# Altium PCB 1x9x1.PcbDoc
Units mm, origin at the board's own origin, x right, y up, seen from the top; angles counter-clockwise.
Board outline 46 x 127 mm, 4 copper layers (Top Layer, Mid-Layer 1, Mid-Layer 2, Bottom Layer), stack 1.105 mm thick; 38 components, 27 nets, 330 pads, 0 vias.
Unrouted connection lines stored in the file: 143.
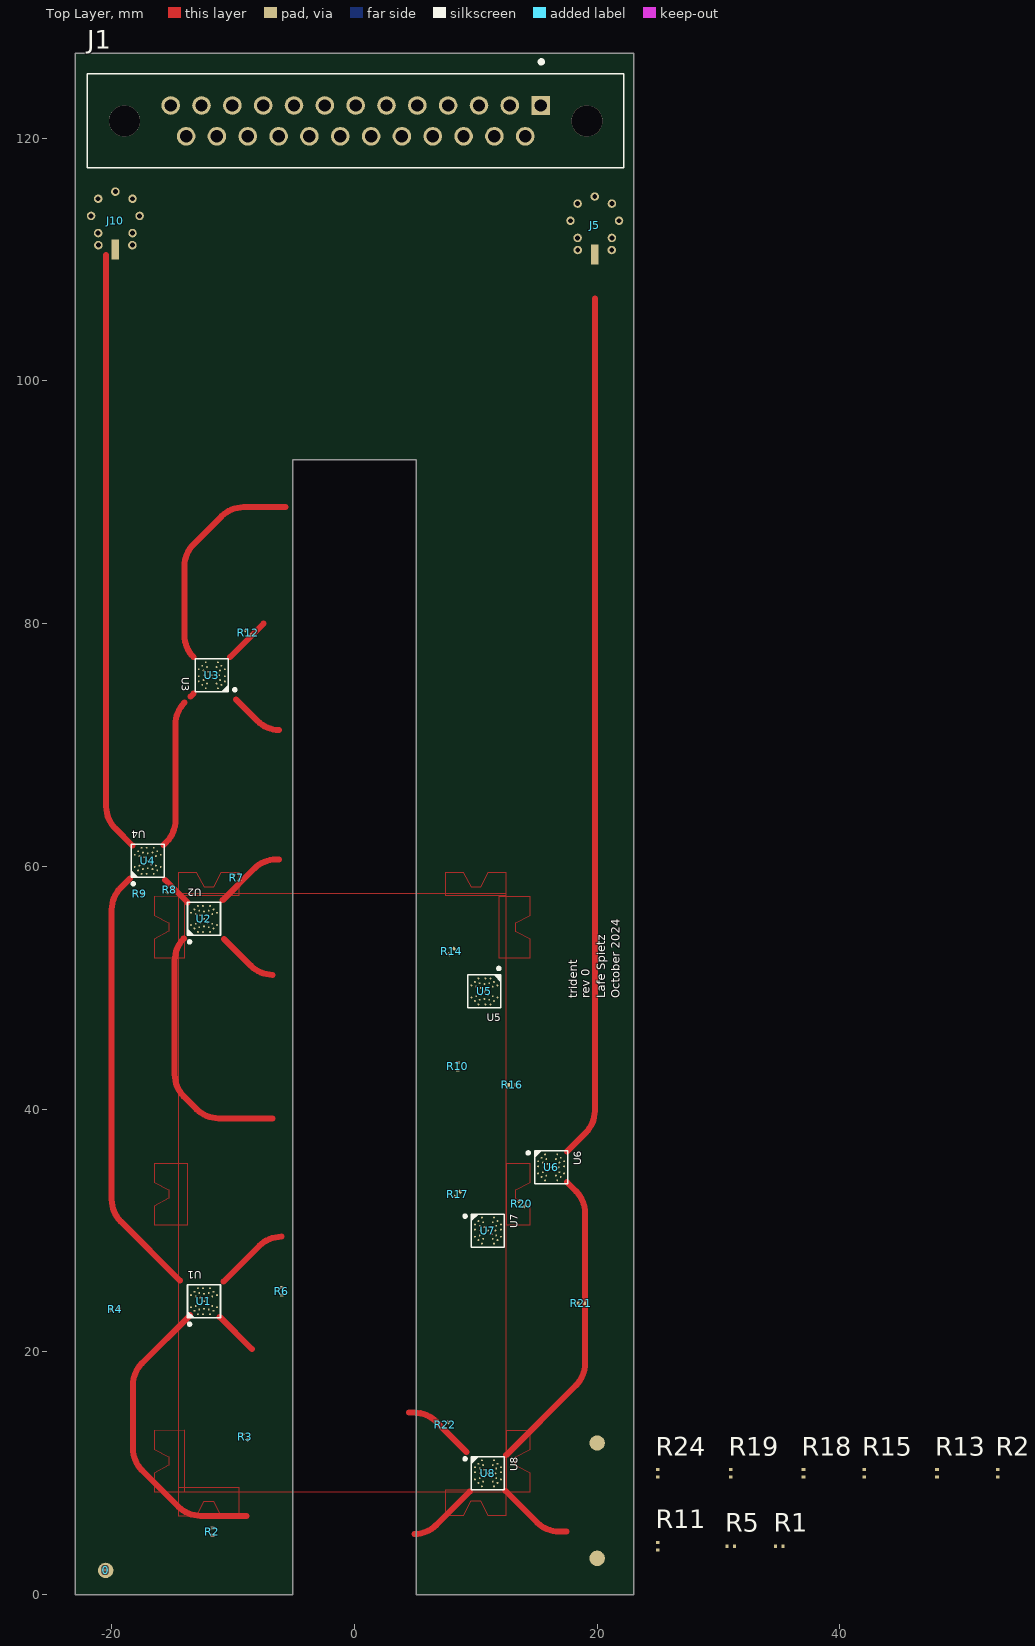
[diagram p0: Top Layer view]
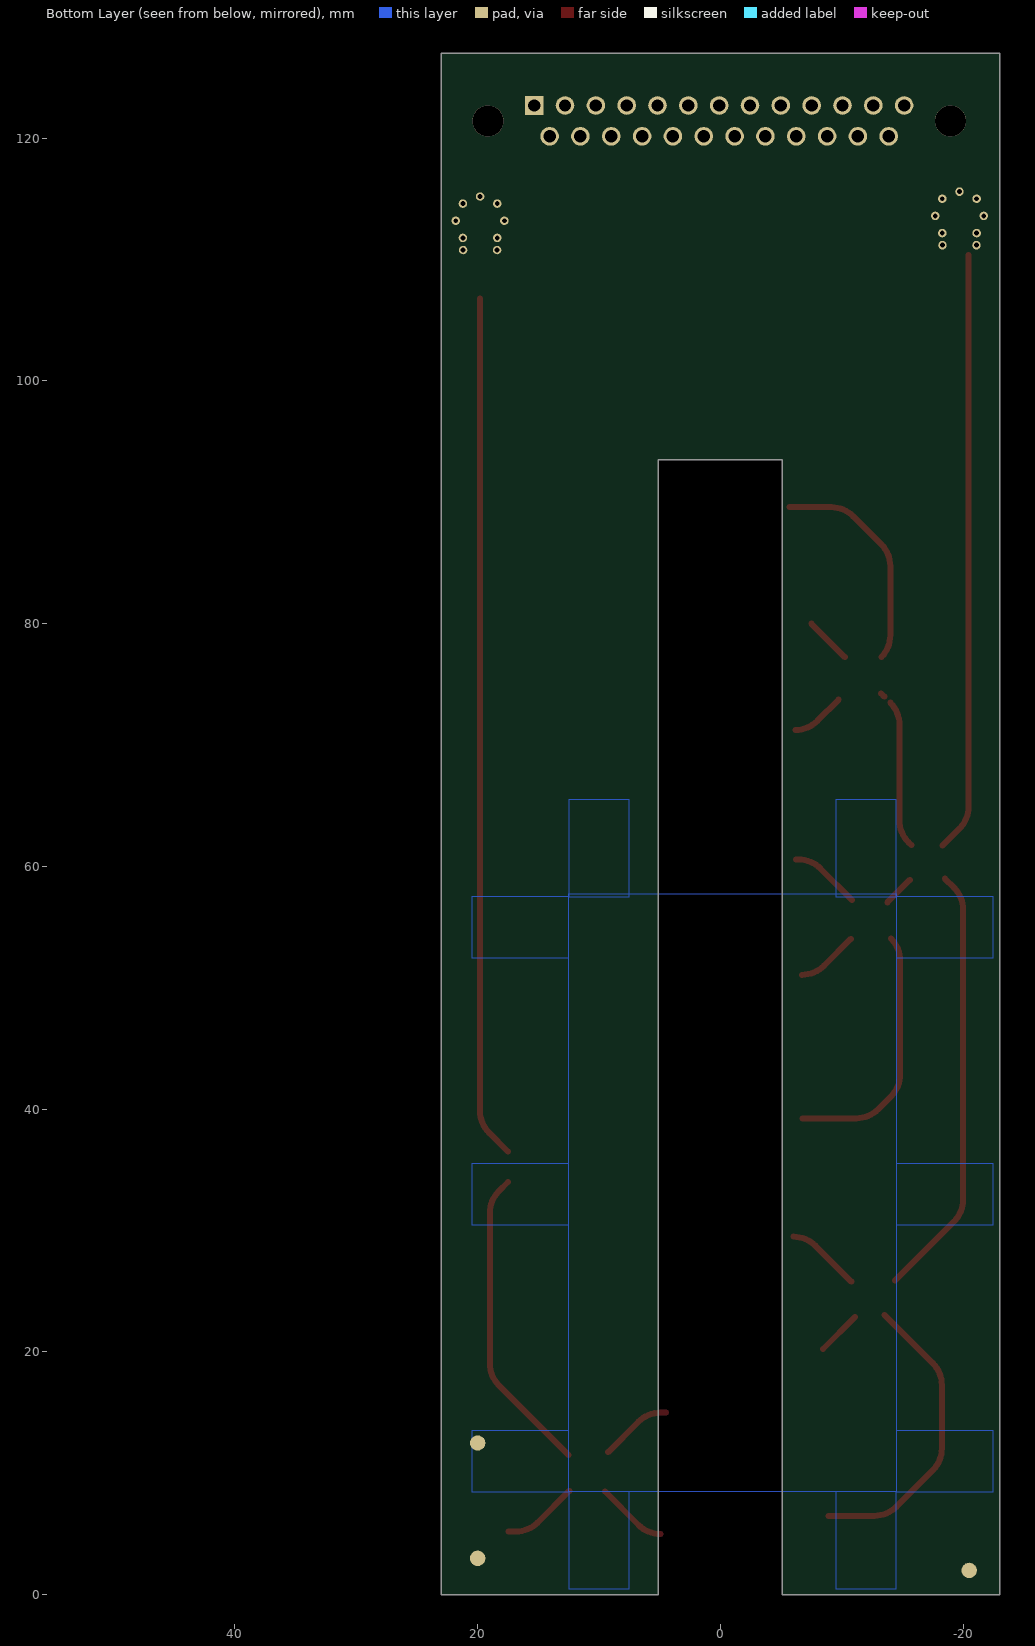
[diagram p1: Bottom Layer view, seen from below]
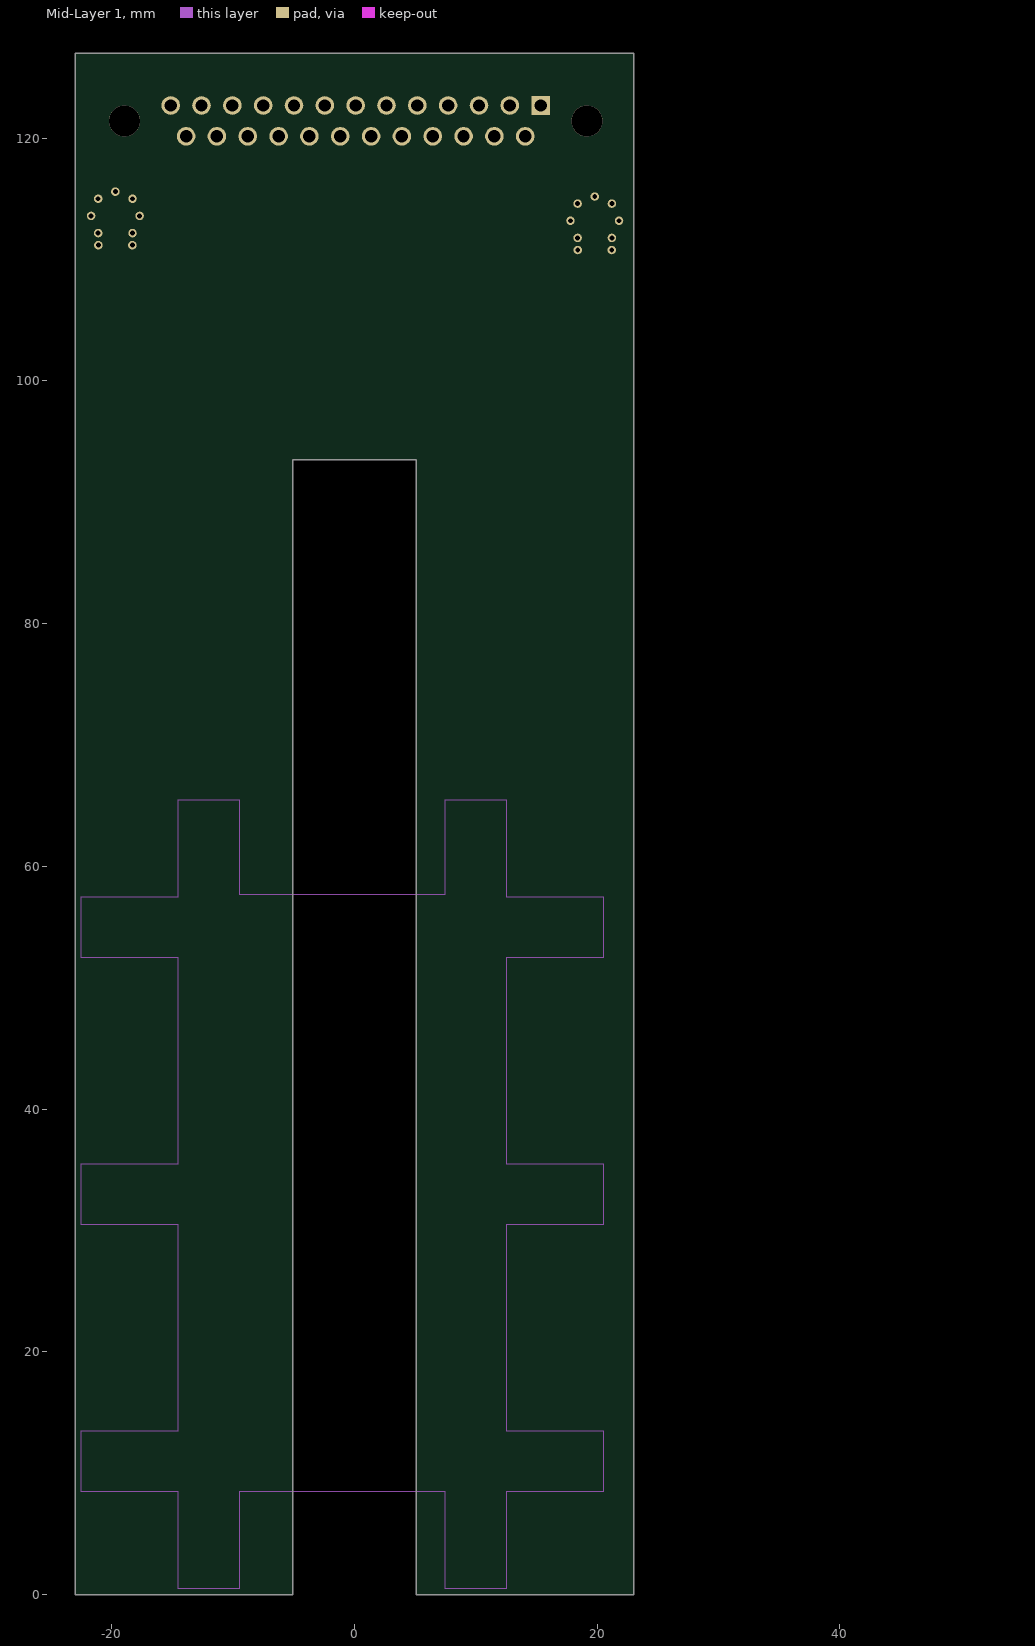
[diagram p2: Mid-Layer 1]
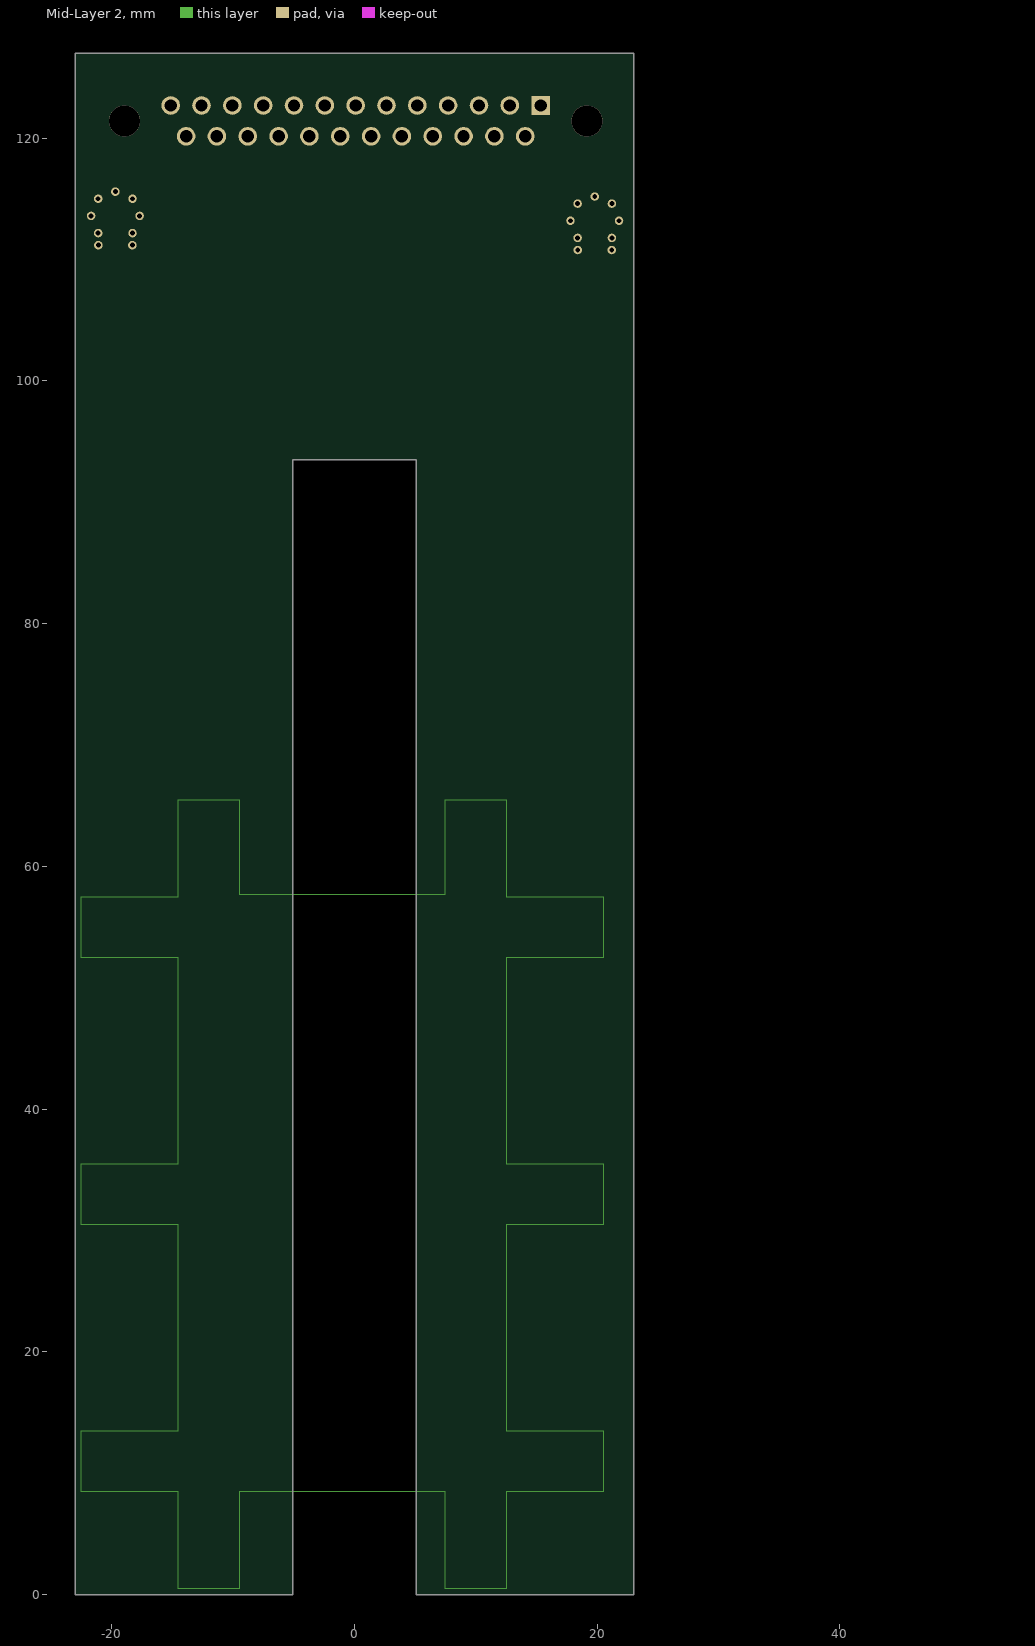
[diagram p3: Mid-Layer 2]

## Layer stack, top to bottom
Top Solder: solder mask 0.0254, SM-001, Dk 4
Top Layer: signal copper 0.035
Core1: dielectric 0.254, RO4350B, Dk 3.48
Mid-Layer 1: signal copper 0.035
Dielectric 1: prepreg 0.1778, PR7628, Dk 4.24
Dielectric 2: prepreg 0.1016, PR2116, Dk 4.17
Dielectric 3: prepreg 0.1778, PR7628, Dk 4.24
Mid-Layer 2: signal copper 0.035
Core2: dielectric 0.254, RO-4350B, Dk 3.48
Bottom Layer: signal copper 0.035
Bottom Solder: solder mask 0.0254, SM-001, Dk 4

## Board outline
-23,0 -23,127 23,127 23,0 5.1,0 5.1,93.5 -5.1,93.5 -5.1,0

## Design rules (kind name [scope] priority, off if disabled: settings)
Clearance [All] p1: gap=0.254 ignorepadtopadclearanceinfootprint=FALSE except(0.095: Track-Region SMDPad-Region Region-Region; 0.1: Track-Track Track-SMDPad; 0.102: Track-Fill; 0.152: Arc-SMDPad Arc-THPad Arc-Poly Track-Poly SMDPad-SMDPad SMDPad-Poly THPad-Poly Via-Poly Fill-Poly Poly-Poly Poly-Region Poly-Hole)
HoleSize [All] p1: absolutevalues=TRUE maxlimit=6.35 minlimit=0.025 maxpercent=80.000 minpercent=20.000
PolygonConnect [All] p1: connectstyle=Direct reliefconductorwidth=0.254 reliefentries=4 polygonreliefangle="90 Angle" airgapwidth=0.254
RoutingCorners [All] p1: cornerstyle=45-Degree minsetback=5 maxsetback=5
RoutingVias [All] p1: holewidth=0.381 width=0.635 viastyle="Through Hole" minholewidth=0.127 minwidth=0.254 maxholewidth=0.711 maxwidth=1.27
SolderMaskExpansion [All] p1: expansion=0.102 istentingtop=FALSE
Width [All] p1 off: maxlimit=0.55 minlimit=0.1 preferedwidth=0.254 toplayer_prefwidth=0.1 midlayer1_minwidth=0.254 midlayer1_maxwidth=0.254 midlayer2_minwidth=0.254 midlayer2_maxwidth=0.254 bottomlayer_minwidth=0.254 bottomlayer_maxwidth=0.254 minimp=50.000000 maximp=50.000000 favimp=50.000000
Width cpw-Z-1 [All] p2 off: maxlimit=0.5 minlimit=0.174 preferedwidth=0.254 toplayer_minwidth=0.323 toplayer_prefwidth=0.406 impedanceprofiledriven=TRUE impedanceprofileid={FF6547F1-1ACB-4B88-A69B-03F59FE56022} minimp=50.000000 maximp=50.000000 favimp=50.000000
28 further rules are at their usual default settings.

## Classes and differential pairs
component class 1x9x1: J1
component class 1x9x1_3: J5 R13 R14 R15 R16 R17 R18 R19 R20 R21 R22 R23 R24 U5 U6 U7 U8
component class 1x9x1_2: 0 J10 R1 R2 R3 R4 R5 R6 R7 R8 R9 R10 R11 R12 U1 U4

## Components (designator, comment, footprint, x,y, rotation, side; value= is the part's Value field where it differs from the comment)
0 "Fiducial" fiducial -20.5,2 r90 top
J1 "M83513/25-D01CP" BEL_M83513/25-D01CP 0.1,121.43 r0 top
J5 "85305-0232" MOLEX_85305-0232 19.8,113.2 r0 top
J10 "85305-0232" MOLEX_85305-0232 -19.7,113.6 r0 top
R1 "TE connectivity CPF0201B56K2E1" 0201-resistor 35,4 r0 top value=56k
R2 "TE connectivity CPF0201B56K2E1" 0201-resistor -11.7,5.2 r270 top value=56k
R3 "TE connectivity CPF0201B56K2E1" 0201-resistor -9,13 r315 top value=56k
R4 "TE connectivity CPF0201B56K2E1" 0201-resistor -19.7,23.5 r180 top value=56k
R5 "TE connectivity CPF0201B56K2E1" 0201-resistor 31,4 r0 top value=56k
R6 "TE connectivity CPF0201B56K2E1" 0201-resistor -6,25 r90 top value=56k
R7 "TE connectivity CPF0201B56K2E1" 0201-resistor -9.715,59.077 r135 top value=56k
R8 "TE connectivity CPF0201B56K2E1" 0201-resistor -15.215,58.077 r225 top value=56k
R9 "TE connectivity CPF0201B56K2E1" 0201-resistor -17.7,57.75 r0 top value=56k
R10 "TE connectivity CPF0201B56K2E1" 0201-resistor 8.5,43.55 r90 top value=56k
R11 "TE connectivity CPF0201B56K2E1" 0201-resistor 25,4 r90 top value=56k
R12 "TE connectivity CPF0201B56K2E1" 0201-resistor -8.75,79.25 r135 top value=56k
R13 "TE connectivity CPF0201B56K2E1" 0201-resistor 48,10 r90 top value=56k
R14 "TE connectivity CPF0201B56K2E1" 0201-resistor 8,53 r45 top value=56k
R15 "TE connectivity CPF0201B56K2E1" 0201-resistor 42,10 r90 top value=56k
R16 "TE connectivity CPF0201B56K2E1" 0201-resistor 13,42 r0 top value=56k
R17 "TE connectivity CPF0201B56K2E1" 0201-resistor 8.5,33 r225 top value=56k
R18 "TE connectivity CPF0201B56K2E1" 0201-resistor 37,10 r90 top value=56k
R19 "TE connectivity CPF0201B56K2E1" 0201-resistor 31,10 r90 top value=56k
R20 "TE connectivity CPF0201B56K2E1" 0201-resistor 13.788,32.212 r315 top value=56k
R21 "TE connectivity CPF0201B56K2E1" 0201-resistor 18.7,24 r180 top value=56k
R22 "TE connectivity CPF0201B56K2E1" 0201-resistor 7.5,14 r225 top value=56k
R23 "TE connectivity CPF0201B56K2E1" 0201-resistor 53,10 r90 top value=56k
R24 "TE connectivity CPF0201B56K2E1" 0201-resistor 25,10 r90 top value=56k
U1 "MM5130*" MM5130-NORM_PCB_NOFLOOD -12.396,24.181 r90 top
U2 "MM5130*" MM5130-NORM_PCB_NOFLOOD -12.396,55.681 r90 top
U3 "MM5130*" MM5130-NORM_PCB_NOFLOOD -11.75,75.75 r180 top
U4 "MM5130*" MM5130-NORM_PCB_NOFLOOD -17.036,60.464 r90 top
U5 "MM5130*" MM5130-NORM_PCB_NOFLOOD 10.71,49.705 r270 top
U6 "MM5130*" MM5130-NORM_PCB_NOFLOOD 16.205,35.21 r0 top
U7 "MM5130*" MM5130-NORM_PCB_NOFLOOD 11,30 r0 top
U8 "MM5130*" MM5130-NORM_PCB_NOFLOOD 11,10 r0 top
? "Fiducial" fiducial 20,3 r0 top
? "Fiducial" fiducial 20,12.5 r0 top

## Footprints (in the part's own frame and the unit in brackets; to place one, negate y for a bottom-side part, rotate by r counter-clockwise, add the part's x,y. Pads: shape width x height; smd on the part's side, far side on the other; paste and mask are expansions set on the pad)
0201-resistor [mm]
  rect 0.25x0.3 smd: 1(-0.3,0) 2(0.3,0)
BEL_M83513/25-D01CP [mm]
  rect 1.53x1.53 hole 1.02: 1(15.24,1.27)
  round 1.53 hole 1.02: 2(12.7,1.27) 3(10.16,1.27) 4(7.62,1.27) 5(5.08,1.27) 6(2.54,1.27) 7(0,1.27) 8(-2.54,1.27) 9(-5.08,1.27) 10(-7.62,1.27) 11(-10.16,1.27) 12(-12.7,1.27) 13(-15.24,1.27) 14(13.97,-1.27) 15(11.43,-1.27) 16(8.89,-1.27) 17(6.35,-1.27) 18(3.81,-1.27) 19(1.27,-1.27) 20(-1.27,-1.27) 21(-3.81,-1.27) 22(-6.35,-1.27) 23(-8.89,-1.27) 24(-11.43,-1.27) 25(-13.97,-1.27)
  round 2.57 hole 2.57 unplated: ""(-19.05,0) ""(19.05,0)
  silkscreen extent -22.1,-3.88 22.1,5.01
fiducial [mm]
  round 1.27 / inner round 0 / far side round 1.27 all layers, no hole paste-2539.97 mask+1.27: 1(0,0)
MM5130-NORM_PCB_NOFLOOD [mm]
  round 0.15 smd mask+0.025: 1(-1.072,0.5) 2(-1.072,0.084) 3(-1.072,-0.5) 4(-0.786,-0.786) 5(-0.5,-1.072) 6(0.5,-1.072) 7(0.786,-0.786) 8(1.072,-0.5) 9(1.072,0.084) 10(1.072,0.5) 11(0.786,0.786) 12(0.5,1.072) 13(-0.5,1.072) 14(-0.786,0.786) 15(-0.681,0.396) 16(-0.615,0) 17(-0.681,-0.396) 18(-0.396,-0.681) 19(0.396,-0.681) 20(0.681,-0.396) 21(0.615,0) 22(0.681,0.396) 23(0.396,0.681) 24(-0.396,0.681) 25(-0.295,0.29) 26(-0.295,-0.29) 27(0.295,-0.29) 28(0.295,0.29) 29(0,0)
  silkscreen extent -1.99,-1.36 1.36,1.36, body extent -1.27,-1.27 1.27,1.27, height 0.98
MOLEX_85305-0232 [mm]
  rect 0.61x1.651 smd: 1(0,-2.775)
  round 0.7 hole 0.4 mask+0: gnd(-2,0) gnd(-1.414,-1.414) gnd(-1.414,1.414) gnd(-1.4,-2.41) gnd(0,2) gnd(1.4,-2.41) gnd(1.414,-1.414) gnd(1.414,1.414) gnd(2,0)
  body extent -2.5,-3.5 2.5,2.5, height 4.06

## Part data
J1: "MIL-DTL-83513 PCB Mounted Connector", Package=None, Availability=Unavailable, MP=M83513/25-D01CP, Price=None
J5 J10: "SMP Connector Plug, Male Pin 50Ohm Surface Mount Solder", Package=None, Availability="In Stock", Check_prices=https://www.snapeda.com/parts/853050232/Molex/view-part/?ref=eda, MF=Molex, MP=853050232, Price=None, Purchase-URL=https://pricing.snapeda.com/search/part/853050232/?ref=eda, SnapEDA_Link=https://www.snapeda.com/parts/853050232/Molex/view-part/?ref=snap
R1 R2 R3 R4 R5 R6 R7 R8 R9 R10 R11 R12 R13 R14 R15 R16 R17 R18 R19 R20 R21 R22 R23 R24: "CPF 0201 56K2 0.1% 25PPM 1K RL", Mfgr Part No.=CPF0201B56K2E1, Package=None, Availability=Unavailable, Mfgr="TE connectivity", MP=ERJ1GN0R00C, Price=None
U1 U2 U3 U4 U5 U6 U7 U8: library part IC-MM5130, "High power SP4T MEMs switch"

## Nets (pads, with @x,y where several pads share a name; then routed paths per layer and width w, separated by ;. In a path a pad name is that pad's centre, name@x,y a point inside that pad or via, vN(x,y) a via of type N, cw(c..) or ccw(c..) an arc to the next point about the centre after c; other vN are vias at no path point)
GND: R1.1 R2.2 R3.1 R4.1 R5.1 R6.1 R7.2 R8.2 R9.2 R10.1 R11.1 R12.2 R13.1 R14.2 R15.2 R16.1 R17.1 R18.1 R19.1 R20.2 R21.2 R22.1 R23.1 R24.1 U1.1 U1.3 U1.5 U1.6 U1.8 U1.10 U1.12 U1.13 U1.15 U1.17 U1.18 U1.19 U1.20 U1.22 U1.23 U1.24 U1.25 U1.26 U1.27 U1.28 U2.1 U2.3 U2.5 U2.6 U2.8 U2.10 U2.12 U2.13 U2.15 U2.17 U2.18 U2.19 U2.20 U2.22 U2.23 U2.24 U2.25 U2.26 U2.27 U2.28 U3.1 U3.3 U3.5 U3.6 U3.8 U3.10 U3.12 U3.13 U3.15 U3.17 U3.18 U3.19 U3.20 U3.22 U3.23 U3.24 U3.25 U3.26 U3.27 U3.28 U4.1 U4.3 U4.5 U4.6 U4.8 U4.10 U4.12 U4.13 U4.15 U4.17 U4.18 U4.19 U4.20 U4.22 U4.23 U4.24 U4.25 U4.26 U4.27 U4.28 U5.1 U5.3 U5.5 U5.6 U5.8 U5.10 U5.12 U5.13 U5.15 U5.17 U5.18 U5.19 U5.20 U5.22 U5.23 U5.24 U5.25 U5.26 U5.27 U5.28 U6.1 U6.3 U6.5 U6.6 U6.8 U6.10 U6.12 U6.13 U6.15 U6.17 U6.18 U6.19 U6.20 U6.22 U6.23 U6.24 U6.25 U6.26 U6.27 U6.28 U7.1 U7.3 U7.5 U7.6 U7.8 U7.10 U7.12 U7.13 U7.15 U7.17 U7.18 U7.19 U7.20 U7.22 U7.23 U7.24 U7.25 U7.26 U7.27 U7.28 U8.1 U8.3 U8.5 U8.6 U8.8 U8.10 U8.12 U8.13 U8.15 U8.17 U8.18 U8.19 U8.20 U8.22 U8.23 U8.24 U8.25 U8.26 U8.27 U8.28 | length 70.9
  Top Layer w0.495: -14.064,54.053 ccw(c-12.268,52.257) -14.808,52.257 -14.808,43.75 -14.808,42.86 ccw(c-12.268,42.86) -14.064,41.064 -12.994,39.994 ccw(c-11.198,41.79) -11.198,39.25 -6.75,39.25 ; -13.538,23.039 -17.506,19.071 ccw(c-15.71,17.275) -18.25,17.275 -18.25,12.052 ccw(c-15.71,12.052) -17.506,10.256 -14.494,7.244 ccw(c-12.698,9.04) -12.698,6.5 -8.9,6.5 ; -13.256,77.249 cw(c-11.46,79.046) -14,79.046 -14,81.5 -14,84.748 cw(c-11.46,84.748) -13.256,86.544 -10.944,88.856 cw(c-9.148,87.06) -9.148,89.6 -5.7,89.6 ; 12.45,8.55 15.053,5.947 ccw(c16.849,7.743) 16.849,5.203 17.459,5.203
NetJ5_1: J5.1 U6.11 | length 71.1
  Top Layer w0.495: 17.497,36.503 19.056,38.061 ccw(c17.26,39.857) 19.8,39.857 19.8,106.8
NetJ10_1: J10.1 U4.11 | length 49.5
  Top Layer w0.495: -20.45,110.39 -20.45,64.93 ccw(c-17.91,64.93) -19.706,63.134 -18.286,61.714
NetR1_2: R1.2 U1.14
NetR2_1: R2.1 U1.4 | length 9.6
  Top Layer w0.495: -11.108,22.893 -8.459,20.244 ; 4.948,5 ccw(c4.948,7.54) 6.744,5.744 9.5,8.5
NetR3_2: R3.2 U1.7 | length 6.2
  Top Layer w0.495: -10.788,25.789 -7.821,28.756 cw(c-6.025,26.96) -6.025,29.5
NetR4_2: R4.2 U1.11 U4.14 | length 35.9
  Top Layer w0.495: -18.5,59 -19.256,58.244 ccw(c-17.46,56.448) -20,56.448 -20,32.552 ccw(c-17.46,32.552) -19.256,30.756 -14.375,25.875
NetR5_2: R5.2 U2.14
NetR6_2: R6.2 U2.4 | length 5.1
  Top Layer w0.495: -10.754,54.038 -8.536,51.821 ccw(c-6.74,53.617) -6.74,51.077
NetR7_1: R7.1 U2.7 | length 5.9
  Top Layer w0.495: -10.857,57.219 -8.244,59.833 cw(c-6.448,58.037) -6.448,60.577 -6.215,60.577
NetR8_1: R8.1 U2.11 U4.4 | length 2.6
  Top Layer w0.495: -15.607,58.892 -13.754,57.038
NetR9_1: R9.1 U3.11 U4.7 | length 12.6
  Top Layer w0.495: -15.75,61.75 -15.494,62.006 ccw(c-17.29,63.802) -14.75,63.802 -14.75,71.698 cw(c-12.21,71.698) -14.006,73.494 ; -13.506,73.994 -13.25,74.25
NetR10_2: R10.2 U3.14 | length 4.5
  Top Layer w0.495: -9.75,73.75 -7.994,71.994 ccw(c-6.198,73.79) -6.198,71.25
NetR11_2: R11.2 U3.7
NetR12_1: R12.1 U3.4 | length 3.9
  Top Layer w0.495: -10.25,77.25 -7.494,80.006
NetR13_2: R13.2 U5.14
NetR14_1: R14.1 U5.4
NetR15_1: R15.1 U7.4
NetR16_2: R16.2 U5.11 U6.14
NetR17_2: R17.2 U7.14
NetR18_2: R18.2 U7.7
NetR19_2: R19.2 U8.7
NetR20_1: R20.1 U6.4 U7.11
NetR21_1: R21.1 U6.7 U8.11 | length 25.6
  Top Layer w0.495: 12.5,11.5 18.256,17.256 ccw(c16.46,19.052) 19,19.052 19,31.448 ccw(c16.46,31.448) 18.256,33.244 17.5,34
NetR22_2: R22.2 U8.14 | length 6
  Top Layer w0.495: 4.5,15 4.948,15 cw(c4.948,12.46) 6.744,14.256 9.25,11.75
NetR23_2: R23.2 U5.7
NetR24_2: R24.2 U8.4
pads on no net: 0.1 ?.1 J1. J1.1 J1.2 J1.3 J1.4 J1.5 J1.6 J1.7 J1.8 J1.9 J1.10 J1.11 J1.12 J1.13 J1.14 J1.15 J1.16 J1.17 J1.18 J1.19 J1.20 J1.21 J1.22 J1.23 J1.24 J1.25 J5.gnd J10.gnd U1.2 U1.9 U1.16 U1.21 U1.29 U2.2 U2.9 U2.16 U2.21 U2.29 U3.2 U3.9 U3.16 U3.21 U3.29 U4.2 U4.9 U4.16 U4.21 U4.29 U5.2 U5.9 U5.16 U5.21 U5.29 U6.2 U6.9 U6.16 U6.21 U6.29 U7.2 U7.9 U7.16 U7.21 U7.29 U8.2 U8.9 U8.16 U8.21 U8.29

## Polygon pours and split planes (outlines as drawn)
GND on Top Layer "NONET_L01_P000" (solid, shelved, pour order 0): -14.5,8.5 12.5,8.5 12.5,57.75 -14.5,57.75
GND on Top Layer "NONET_L02_P-001" (solid, shelved, pour order 21): 14.487,32 13.287,32.625 13.287,33.35 14.487,34 14.487,35.5 12.5,35.5 12.5,30.474 14.487,30.5
GND on Top Layer "NONET_L02_P-001" (solid, shelved, pour order 19): -16.487,34 -15.287,33.375 -15.287,32.65 -16.487,32 -16.487,30.5 -13.736,30.5 -13.736,35.5 -16.487,35.5
GND on Top Layer "NONET_L02_P-001" (solid, shelved, pour order 24): -11,59.487 -11.625,58.287 -12.35,58.287 -13,59.487 -14.5,59.487 -14.5,57.612 -9.475,57.612 -9.5,59.487
GND on Top Layer "NONET_L02_P-001" (solid, shelved, pour order 23): 11,59.487 10.375,58.287 9.65,58.287 9,59.487 7.5,59.487 7.5,57.612 12.525,57.612 12.5,59.487
GND on Top Layer "NONET_L02_P-001" (solid, shelved, pour order 22): 14.487,54 13.287,54.625 13.287,55.35 14.487,56 14.487,57.5 11.888,57.5 11.888,52.465 14.487,52.5
GND on Top Layer "NONET_L02_P-001" (solid, shelved, pour order 20): -16.487,56 -15.287,55.375 -15.287,54.65 -16.487,54 -16.487,52.5 -14,52.5 -14,57.533 -16.487,57.5
GND on Top Layer "NONET_L02_P-001" (solid, shelved, pour order 18): -16.487,12 -15.287,11.375 -15.287,10.65 -16.487,10 -16.487,8.5 -14,8.5 -14,13.533 -16.487,13.5
GND on Top Layer "NONET_L02_P-001" (solid, shelved, pour order 17): 14.475,10 13.275,10.625 13.275,11.35 14.475,12 14.475,13.5 12.5,13.5 12.5,8.474 14.475,8.5
GND on Top Layer "NONET_L02_P-001" (solid, shelved, pour order 16): -13,6.513 -12.375,7.713 -11.65,7.713 -11,6.513 -9.5,6.513 -9.5,8.828 -14.531,8.828 -14.5,6.513
GND on Top Layer "NONET_L02_P-001" (solid, shelved, pour order 15): 9,6.55 9.625,7.75 10.35,7.75 11,6.55 12.5,6.55 12.5,8.6 7.473,8.6 7.5,6.55
GND on Bottom Layer "NONET_L04_P036" (solid, shelved, pour order 36): -14.5,8.5 -22.5,8.5 -22.5,13.5 -14.5,13.5
GND on Bottom Layer "NONET_L04_P029" (solid, shelved, pour order 29): 12.5,13.5 20.5,13.5 20.5,8.5 12.5,8.5
GND on Bottom Layer "NONET_L04_P028" (solid, shelved, pour order 28): 12.5,8.5 12.5,0.5 7.5,0.5 7.5,8.5
GND on Bottom Layer "NONET_L04_P027" (solid, shelved, pour order 27): -9.5,8.5 -9.5,0.5 -14.5,0.5 -14.5,8.5
GND on Bottom Layer "NONET_L04_P034" (solid, shelved, pour order 34): -14.5,52.5 -22.5,52.5 -22.5,57.5 -14.5,57.5
GND on Bottom Layer "NONET_L04_P033" (solid, shelved, pour order 33): -14.5,57.5 -14.5,65.5 -9.5,65.5 -9.5,57.5
GND on Bottom Layer "NONET_L04_P032" (solid, shelved, pour order 32): 7.5,57.5 7.5,65.5 12.5,65.5 12.5,57.5
GND on Bottom Layer "NONET_L04_P031" (solid, shelved, pour order 31): 12.5,57.5 20.5,57.5 20.5,52.5 12.5,52.5
GND on Bottom Layer "NONET_L02_P-001" (solid, shelved, pour order 26): -14.5,8.5 12.5,8.5 12.5,57.75 -14.5,57.75
GND on Bottom Layer "NONET_L04_P035" (solid, shelved, pour order 35): -14.5,30.5 -22.5,30.5 -22.5,35.5 -14.5,35.5
GND on Bottom Layer "NONET_L04_P030" (solid, shelved, pour order 30): 12.5,35.5 20.5,35.5 20.5,30.5 12.5,30.5
no net on Top Solder "NONET_L-01_P-001" (solid, shelved): -10.075,52.925 -10.075,57.75 12.325,57.75 12.325,52.925
no net on Top Solder "NONET_L02_P-001" (solid, shelved): -14.5,13 -14.5,31 -9.25,31 -9.25,13
no net on Top Solder "NONET_L-01_P-001" (solid, shelved): -14.325,13.525 -18.225,13.525 -18.225,12.004 -18.227,12.002 -18.225,12 -18.225,11.4 -16.5,11.4 -16.5,10.6 -18.225,10.6 -18.225,8.5 -14.27,8.5 -13.95,8.82 -13.95,13.5 -14.3,13.5
no net on Top Solder "NONET_L-01_P-001" (solid, shelved): -13.95,10.975 -11.825,13.1 -13.95,13.1
no net on Top Solder "NONET_L-01_P-001" (solid, shelved): -10.05,11.025 -11.975,12.95 -11.85,13.075 -9.625,13.075 -9.625,11.025
no net on Top Solder "NONET_L-01_P-001" (solid, shelved): -9.6,33.45 -12.175,30.875 -9.6,30.875
no net on Top Solder "NONET_L-01_P-001" (solid, shelved): -11.825,30.875 -13.95,33 -13.95,30.875
no net on Top Solder "NONET_L02_P-001" (solid, shelved): 8,35.7 8,13.5 -10.025,13.5 -10.025,35.7
no net on Top Solder "NONET_L02_P-001" (solid, shelved): -10.05,13.5 7.75,13.5 7.75,8.5 -10.25,8.5 7.75,8.5 -10.05,8.5
no net on Top Solder "NONET_L-01_P-001" (solid, shelved): -14.325,35.525 -18.225,35.525 -18.225,34.004 -18.227,34.002 -18.225,34 -18.225,33.4 -16.5,33.4 -16.5,32.6 -18.225,32.6 -18.225,30.5 -14.27,30.5 -13.95,30.82 -13.95,35.5 -14.3,35.5
no net on Top Solder "NONET_L02_P-001" (solid, shelved): -9.5,35 -9.5,53 -14.5,53 -14.5,35 -14.5,53 -14.5,35
no net on Top Solder "NONET_L-01_P-001" (solid, shelved): -10.05,33 -11.975,34.925 -11.85,35.05 -9.625,35.05 -9.625,33
no net on Top Solder "NONET_L-01_P-001" (solid, shelved): -10.075,55.05 -12.2,52.925 -10.075,52.925
no net on Top Solder "NONET_L-01_P-001" (solid, shelved): -13.95,32.95 -11.825,35.075 -13.95,35.075
no net on Top Solder "NONET_L-01_P-001" (solid, shelved): -14.35,57.525 -18.25,57.525 -18.25,56.004 -18.252,56.002 -18.25,56 -18.25,55.4 -16.525,55.4 -16.525,54.6 -18.25,54.6 -18.25,52.5 -14.295,52.5 -13.975,52.82 -13.975,57.5 -14.325,57.5
no net on Top Solder "NONET_L-01_P-001" (solid, shelved): -11.85,52.925 -13.975,55.05 -13.975,52.925
no net on Top Solder "NONET_L-01_P-001" (solid, shelved): 12.325,52.475 16.225,52.475 16.225,53.996 16.227,53.998 16.225,54 16.225,54.6 14.5,54.6 14.5,55.4 16.225,55.4 16.225,57.5 12.27,57.5 11.925,57.155 11.925,52.5 12.3,52.5
no net on Top Solder "NONET_L-01_P-001" (solid, shelved): 12.525,57.35 12.525,61.25 11.004,61.25 11.002,61.252 11,61.25 10.4,61.25 10.4,59.525 9.6,59.525 9.6,61.25 7.5,61.25 7.5,57.295 7.52,57.275 12.5,57.275 12.5,57.325
no net on Top Solder "NONET_L-01_P-001" (solid, shelved): 12.338,8.475 16.238,8.475 16.238,9.996 16.239,9.998 16.238,10 16.238,10.6 14.513,10.6 14.513,11.4 16.238,11.4 16.238,13.5 12.283,13.5 12.263,13.48 12.263,8.5 12.313,8.5
no net on Top Solder "NONET_L-01_P-001" (solid, shelved): -14.525,8.65 -14.525,4.75 -13.004,4.75 -13.002,4.748 -13,4.75 -12.4,4.75 -12.4,6.475 -11.6,6.475 -11.6,4.75 -9.5,4.75 -9.5,8.705 -9.695,8.9 -14.5,8.9 -14.5,8.675
no net on Top Solder "NONET_L-01_P-001" (solid, shelved): -10.05,11.025 -12.175,8.9 -10.05,8.9
no net on Top Solder "NONET_L02_P-001" (solid, shelved): 12.5,25.725 12.5,30.75 7.75,30.75 7.75,8.725 12.49,8.725 12.49,25.725
no net on Top Solder "NONET_L-01_P-001" (solid, shelved): -10.075,55.05 -12.083,57.058 -11.891,57.25 -9.65,57.25 -9.65,55.05
no net on Top Solder "NONET_L-01_P-001" (solid, shelved): -9.475,57.325 -9.475,61.225 -10.996,61.225 -10.998,61.227 -11,61.225 -11.6,61.225 -11.6,59.5 -12.4,59.5 -12.4,61.225 -14.5,61.225 -14.5,57.27 -14.355,57.125 -9.5,57.125 -9.5,57.3
no net on Top Solder "NONET_L-01_P-001" (solid, shelved): -11.825,8.9 -13.95,11.025 -13.95,8.9
no net on Top Solder "NONET_L-01_P-001" (solid, shelved): -13.975,55 -11.723,57.252 -13.975,57.252
no net on Top Solder "NONET_L-01_P-001" (solid, shelved): 12.35,30.475 16.25,30.475 16.25,31.996 16.252,31.998 16.25,32 16.25,32.6 14.525,32.6 14.525,33.4 16.25,33.4 16.25,35.5 12.295,35.5 12.275,35.48 12.275,30.5 12.325,30.5
no net on Top Solder "NONET_L-01_P-001" (solid, shelved): 7.475,8.65 7.475,4.75 8.996,4.75 8.998,4.748 9,4.75 9.6,4.75 9.6,6.475 10.4,6.475 10.4,4.75 12.5,4.75 12.5,8.705 12.48,8.725 7.5,8.725 7.5,8.675
no net on Top Solder "NONET_L-01_P-001" (solid, shelved): 9.976,35.562 9.976,34.962 11.976,32.962 9.976,30.962 9.976,30.362 12.576,30.362 12.776,30.562 12.776,35.562
no net on Top Solder "NONET_L-01_P-001" (solid, shelved): 10,30.4 10,31 8,33 10,35 10,35.6 7.4,35.6 7.2,35.4 7.2,30.4
GND on Mid-Layer 1 "NONET_L02_P037" (solid, shelved, pour order 37): -14.5,0.5 -14.5,8.5 -22.5,8.5 -22.5,13.5 -14.5,13.5 -14.5,30.5 -22.5,30.5 -22.5,35.5 -14.5,35.5 -14.5,52.5 -22.5,52.5 -22.5,57.5 -14.5,57.5 -14.5,65.5 -9.5,65.5 -9.5,57.7 7.5,57.7 7.5,65.5 12.5,65.5 12.5,57.5 20.5,57.5 20.5,52.5 12.5,52.5 12.5,35.5 20.5,35.5 20.5,30.5 12.5,30.5 12.5,13.5 20.5,13.5 20.5,8.5 12.5,8.5 12.5,0.5 7.5,0.5 7.5,8.5 -9.5,8.5 -9.5,0.5
GND on Mid-Layer 2 "NONET_L03_P038" (solid, shelved, pour order 38): -14.5,0.5 -14.5,8.5 -22.5,8.5 -22.5,13.5 -14.5,13.5 -14.5,30.5 -22.5,30.5 -22.5,35.5 -14.5,35.5 -14.5,52.5 -22.5,52.5 -22.5,57.5 -14.5,57.5 -14.5,65.5 -9.5,65.5 -9.5,57.7 7.5,57.7 7.5,65.5 12.5,65.5 12.5,57.5 20.5,57.5 20.5,52.5 12.5,52.5 12.5,35.5 20.5,35.5 20.5,30.5 12.5,30.5 12.5,13.5 20.5,13.5 20.5,8.5 12.5,8.5 12.5,0.5 7.5,0.5 7.5,8.5 -9.5,8.5 -9.5,0.5

## Silkscreen, mask and mechanical layers (free items; w line width, h text height)
Top Overlay:
  text "trident" at 18.373,49.127 h0.69 r90
  text "rev 0" at 19.373,49.127 h0.69 r90
  text "Lafe Spietz" at 20.644,49.127 h0.69 r90
  text "October 2024" at 21.873,49.127 h0.69 r90
Top Solder:
  pour cut-out: 0,44.476 -0.889,44.476 -0.889,46 0,46
Mechanical 1:
  lines w0.254: -23,0 -5.1,0 -5.1,90 -5.1,93.5 5.1,93.5 5.1,93.1 5.1,0 23,0 23,127 -23,127 -23,0